# Altium PCB Biological Payload Data Consolidator.PcbDoc
Units mil, origin at the board's own origin, x right, y up, seen from the top; angles counter-clockwise.
Board outline 2500 x 2500 mil, 2 copper layers (Top Layer, Bottom Layer); 63 components, 50 nets, 249 pads, 126 vias.
Unrouted connection lines stored in the file: 2.
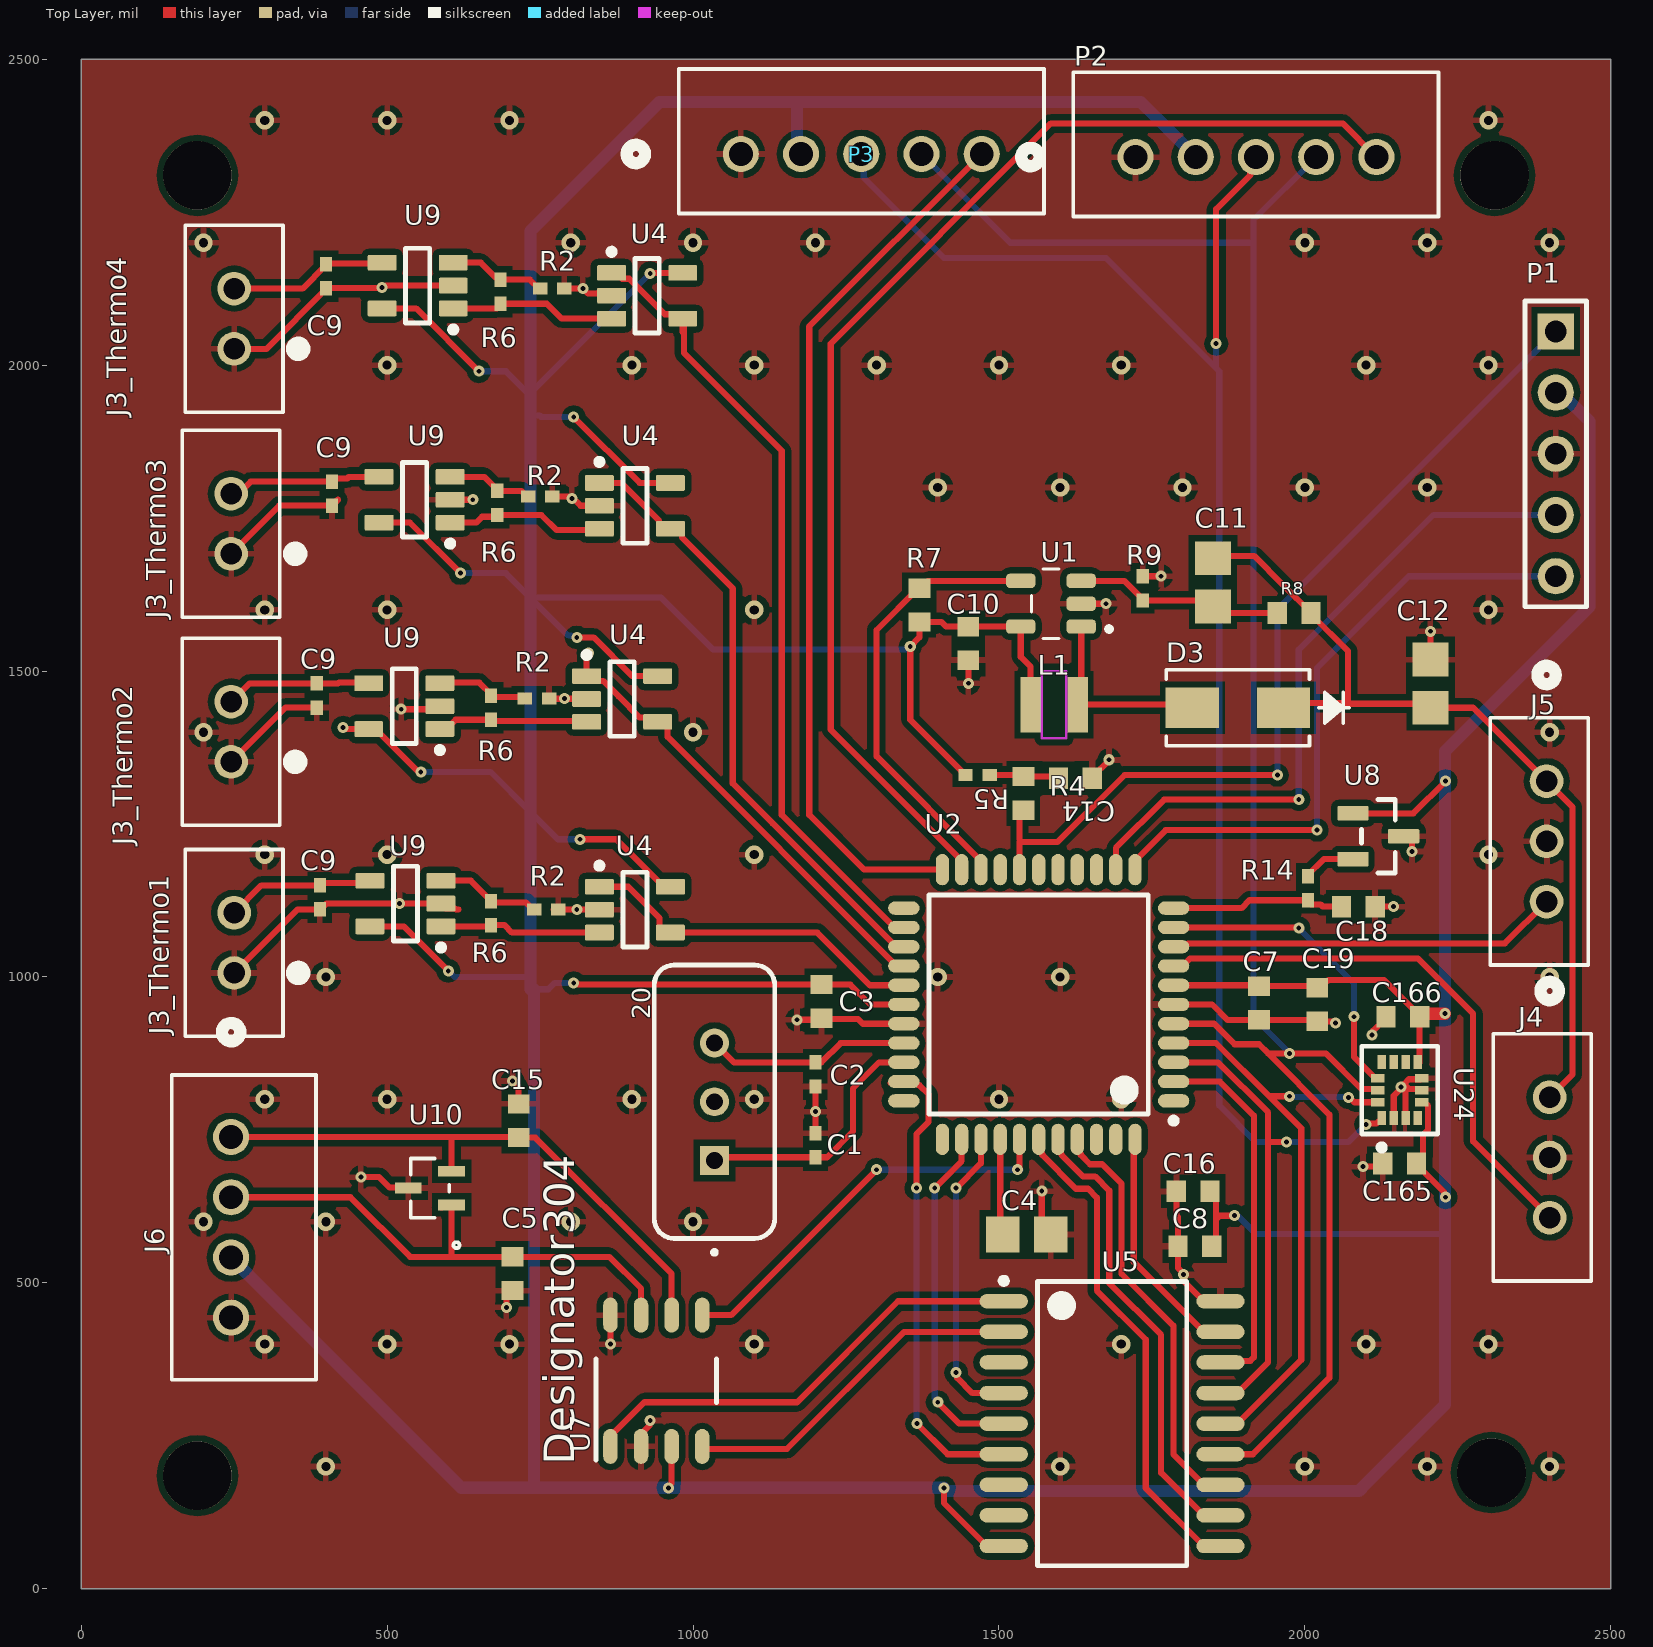
[diagram p0: Top Layer view]
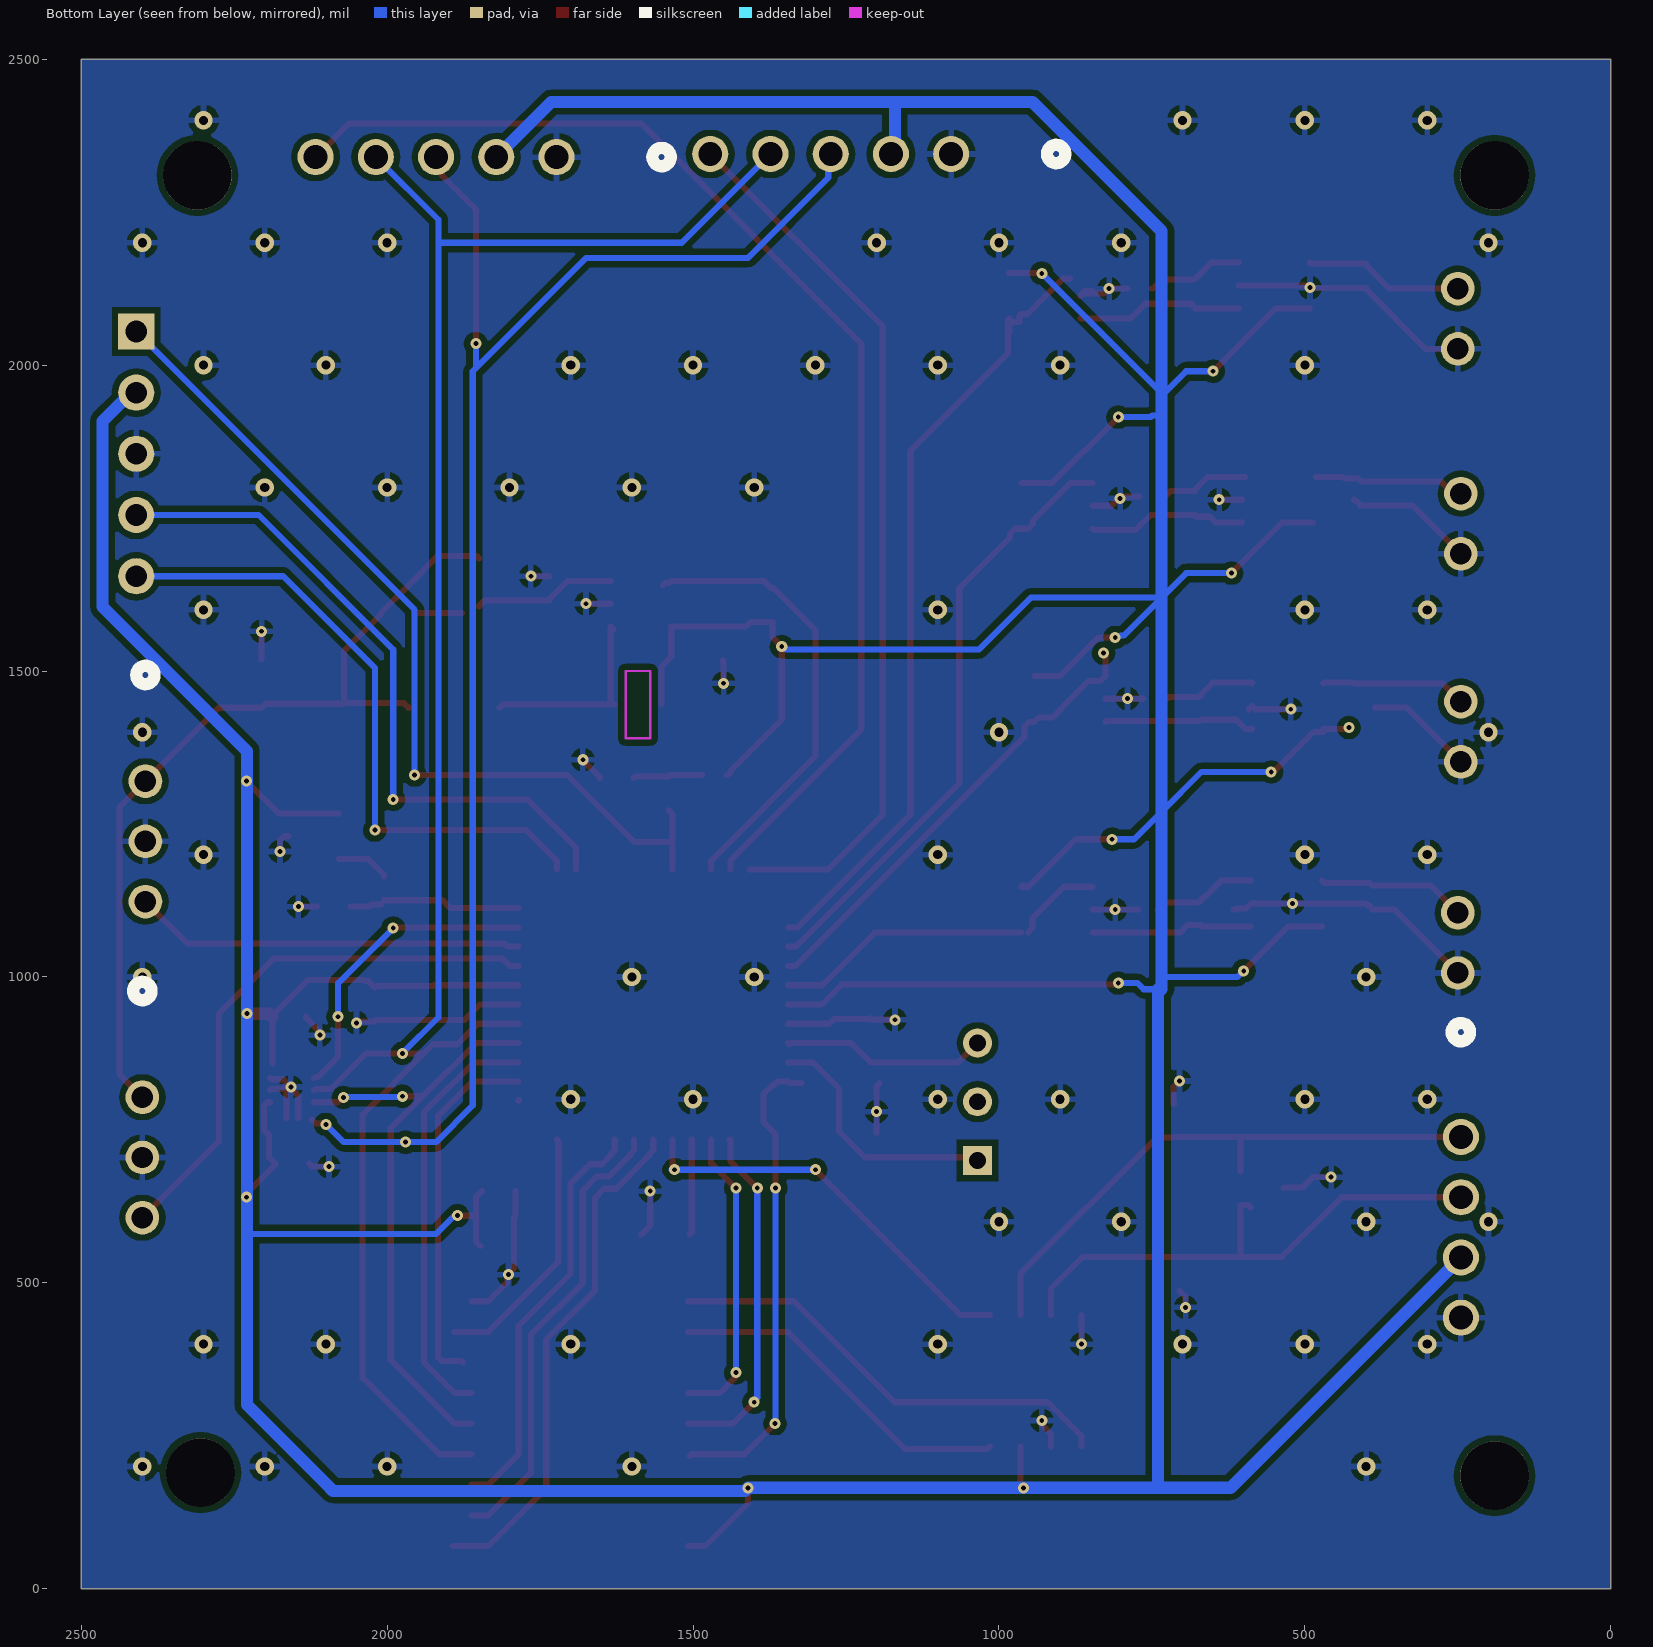
[diagram p1: Bottom Layer view, seen from below]

## Layer stack, top to bottom
Top Solder: solder mask 0.4, Solder Resist, Dk 3.5
Top Layer: signal copper 1.4
Dielectric 1: dielectric 12.6, FR-4, Dk 4.8
Bottom Layer: signal copper 1.4
Bottom Solder: solder mask 0.4, Solder Resist, Dk 3.5

## Board outline
0,0 2500,0 2500,2500 0,2500

## Design rules (kind name [scope] priority, off if disabled: settings)
Clearance [All] p1: gap=5 ignorepadtopadclearanceinfootprint=FALSE except(0: Arc-Text Arc-Hole Track-Text Track-Hole SMDPad-Hole THPad-Hole Via-Text Via-Hole Fill-Text Fill-Hole Poly-Text Poly-Hole Region-Text Region-Hole Text-Hole; 6: SMDPad-Text THPad-Text Text-Text; 10: Arc-Via Track-Via SMDPad-Via THPad-Via THPad-Fill THPad-Poly THPad-Region Via-Via Via-Fill Via-Poly Via-Region)
HoleSize [All] p1: absolutevalues=TRUE maxlimit=200 minlimit=1 maxpercent=80.000 minpercent=20.000
PolygonConnect [All] p1: connectstyle=Relief reliefconductorwidth=10 reliefentries=4 polygonreliefangle="90 Angle" airgapwidth=10
RoutingVias [All] p1: holewidth=28 width=50 viastyle="Through Hole" minholewidth=28 minwidth=50 maxholewidth=28 maxwidth=50
SolderMaskExpansion SolderMaskExpansion_1 [IsVia] p1: expansion=4 istentingtop=TRUE
SolderMaskExpansion [All] p2: expansion=2 istentingtop=FALSE
Width [All] p1: maxlimit=20 minlimit=5 preferedwidth=10 minimp=50.000000 maximp=50.000000 favimp=50.000000
29 further rules are at their usual default settings.

## Classes and differential pairs
component class Thermo4: C9 J3_Thermo4 J?_Thermo4 R2 R2_4 R6 U4 U9
component class Thermo3: C9 J3_Thermo3 J?_Thermo3 R2 R6 U4 U9
component class Thermo2: C9 J3_Thermo2 J?_Thermo2 R2 R6 U4 U9
component class Thermo1: C9 J3_Thermo1 J?_Thermo1 R2 R6 U4 U9
channel class Thermocouple: Thermocouple1 Thermocouple2 Thermocouple3 Thermocouple4
net class THERMO[1..4]: THERMO1 THERMO2
net class LED[1..2]: LED1 LED2
component class Designator: 20 C1 C2 C3 C4 C7 C14 P1 P2 P3 R4 R5 U2
component class Boost: C10 C11 C12 D3 L1 R7 R8 R9 U1 U?

## Components (designator, comment, footprint, x,y, rotation, side; value= is the part's Value field where it differs from the comment)
20 "ECS-200-20-4X" ECS-4X-3IL 1035,796.06 r90 top
C1 "Cap" 0402-A 1200,725 r90 top value=20pF
C2 "Cap" 0402-A 1199.84,840.63 r90 top value=20pF
C3 "Cap" 1608[0603] 1210,960 r90 top value=100nF
C4 "Cap" 6-0805_M 1545.37,579 r0 top value=10uF
C5 "Cap" 1608[0603] 705,515 r90 top value=100nF
C7 "Cap" 1608[0603] 1925,957.44 r90 top value=100nF
C8 "Cap" 1608[0603] 1820,560 r180 top value=100nF
C9 "Cap" 0402-A 400,2145.31 r90 top value=100pF
C9 "Cap" 0402-A 410,1790 r90 top value=100pF
C9 "Cap" 0402-A 385,1460 r90 top value=100pF
C9 "Cap" 0402-A 390,1130 r90 top value=100pF
C10 "Cap" 1608[0603] 1450,1545 r90 top value=2.2uF
C11 "Cap" 6-0805_M 1850,1645 r270 top value=510pF
C12 "Cap" 6-0805_M 2205,1479.37 r270 top value=4.7uF
C14 "Cap" 1608[0603] 1625,1325 r180 top value=100nF
C15 "Cap" 1608[0603] 715,765 r270 top value=100nF
C16 "Cap" 1608[0603] 1817.44,650 r0 top value=1nF
C18 "Cap" 1608[0603] 2087.44,1115 r180 top value=680pF
C19 "Cap" 1608[0603] 2020,955 r90 top value=100nF
C165 "Cap" 1608[0603] 2155,695 r0 top value=100nF
C166 "Cap" 1608[0603] 2160,935 r0 top value=100nF
D3 "CDBA5150-HF" CDBA5 1890.5,1440 r180 top
J3_Thermo1 "B2B-EH-A (LF)(SN)" "CONN_B2B-EH-A (LF)(SN)_JST" 250,1006.57 r90 top (schematic designator J3)
J3_Thermo2 "B2B-EH-A (LF)(SN)" "CONN_B2B-EH-A (LF)(SN)_JST" 245,1351.57 r90 top (schematic designator J3)
J3_Thermo3 "B2B-EH-A (LF)(SN)" "CONN_B2B-EH-A (LF)(SN)_JST" 245,1691.57 r90 top (schematic designator J3)
J3_Thermo4 "B2B-EH-A (LF)(SN)" "CONN_B2B-EH-A (LF)(SN)_JST" 250,2026.57 r90 top (schematic designator J3)
J4 "B3B-EH-A(LF)(SN)" CONN3_B3B-EH-A(LF)(SN)_JST 2400,803.43 r270 top
J5 "B3B-EH-A(LF)(SN)" CONN3_B3B-EH-A(LF)(SN)_JST 2395,1320 r270 top
J6 "B4B-XH-A (LF)(SN)" "CONN_B4B-XH-A (LF)(SN)_JST" 245,738.43 r270 top
L1 "74438323100" "SMD 2510" 1590,1445 r0 top
P1 "Header 5" HDR1X5 2410,2055 r270 top
P2 "Header 5" "CONN_B5B-XH-A (LF)(SN)_JST" 1723.14,2340 r0 top
P3 "Header 5" "CONN_B5B-XH-A (LF)(SN)_JST" 1078.14,2345 r0 top
R2 "Res1" 0402-A 770,2125 r0 top value=1k
R2 "Res1" 0402-A 750.31,1785 r0 top value=1k
R2 "Res1" 0402-A 745,1455 r0 top value=1k
R2 "Res1" 0402-A 760.32,1110 r0 top value=1k
R4 "Res1" 1608[0603] 1540,1300 r270 top value=330
R5 "Res1" 0402-A 1465,1330 r180 top value=10k
R6 "Res1" 0402-A 685,2120 r90 top value=1M
R6 "Res1" 0402-A 680,1774.68 r90 top value=1M
R6 "Res1" 0402-A 670,1440 r90 top value=1M
R6 "Res1" 0402-A 670,1104.33 r90 top value=1M
R7 "Res1" 1608[0603] 1370,1607.56 r90 top value=51k
R8 "Res1" 1608[0603] 1982.44,1595 r0 top value=51k
R9 "Res1" 0402-A 1735,1635 r90 top value=10k
R14 "Res1" 0402-A 2005,1145 r270 top value=0
U1 "LMR62014XMF/NOPD" SOT95P280X145-5N 1585,1610 r180 top
U2 "PIC18LF45K50-I/PT" MCHP-TQFP-PT44_L 1565,955 r180 top
U4 "OPA336NA/250" DBV0005A_M 884.14,1454.3 r0 top
U4 "OPA336NA/250" DBV0005A_M 925.04,2113.39 r0 top
U4 "OPA336NA/250" DBV0005A_M 905,1770 r0 top
U4 "OPA336NA/250" DBV0005A_M 905,1110 r0 top
U5 "MCP2515-I/SO" SOIC-SO18_L 1685,270 r0 top
U7 "TCAN334DR" D0008A_N 940,340 r90 top value=Value
U8 "TMP235AQDBZTQ1" FP-DBZ0003A-MFG 2120,1230 r0 top
U9 "OPA336NA/250" DBV0005A_M 550,2130 r180 top
U9 "OPA336NA/250" DBV0005A_M 545,1780 r180 top
U9 "OPA336NA/250" DBV0005A_M 528.07,1442.6 r180 top
U9 "OPA336NA/250" DBV0005A_M 530,1120 r180 top
U10 "D5V0L2B3W-7" SOT-323_DIO 570,655 r90 top
U24 "LSM6DSMTR" FP-LGA-14L-DM00249496-MFG 2155,815 r90 top

## Footprints (in the part's own frame and the unit in brackets; to place one, negate y for a bottom-side part, rotate by r counter-clockwise, add the part's x,y. Pads: shape width x height; smd on the part's side, far side on the other; paste and mask are expansions set on the pad)
6-0805_M [mm] "Chip Resistor, Body 2.0x1.2mm, IPC Low Density"
  rect 1.4x1.5 smd: 1(-1,0) 2(1,0)
  body extent -1.07,-0.7 1.07,0.7, height 0.7
0402-A [mm] "Chip Inductor, Body 1.0x0.5mm, IPC High Density"
  rect 0.6x0.5 smd: 1(-0.5,0) 2(0.5,0)
  body extent -0.55,-0.3 0.55,0.3, height 0.55
1608[0603] [mm] "Chip Capacitor, Body 1.6x0.8mm, IPC High Density"
  rect 0.8x0.9 smd: 1(-0.7,0) 2(0.7,0)
  body extent -0.87,-0.48 0.87,0.48, height 1.3
CDBA5 [mil]
  rect 87x67 smd paste+0 mask+0: 1(-74.5,0) 2(74.5,0)
  silkscreen extent -182,-62 117,62, body extent 0,0 10,10, height 10
CONN3_B3B-EH-A(LF)(SN)_JST [mil]
  round 55 hole 35 mask+0: 1(0,0) 2(98.43,0) 3(196.85,0)
  silkscreen extent -189,-92 300,68, body extent 0,0 10,10, height 10
"CONN_B2B-EH-A (LF)(SN)_JST" [mil]
  round 55 hole 35 mask+0: 1(0,0) 2(98.43,0)
  silkscreen extent -103,-115 202,80, body extent 0,0 10,10, height 10
"CONN_B4B-XH-A (LF)(SN)_JST" [mil]
  round 59 hole 39 mask+0: 1(0,0) 2(98.43,0) 3(196.86,0) 4(295.29,0)
  silkscreen extent -186,-97 397,139, body extent 0,0 10,10, height 10
"CONN_B5B-XH-A (LF)(SN)_JST" [mil]
  round 59 hole 39 mask+0: 1(0,0) 2(98.43,0) 3(196.86,0) 4(295.29,0) 5(393.72,0)
  silkscreen extent -187,-97 495,139, body extent 0,0 10,10, height 10
D0008A_N [mm]
  oval 1.45x0.6 smd paste+0 mask+0.051: 1(-2.725,1.905) 2(-2.725,0.635) 3(-2.725,-0.635) 4(-2.725,-1.905) 5(2.725,-1.905) 6(2.725,-0.635) 7(2.725,0.635) 8(2.725,1.905)
  silkscreen extent -3.3,-2.5 0.9,2.5, body extent 0,0 0.25,0.25, height 0.25
DBV0005A_M [mm] "SOT23, 5-Leads, Body 3.05x1.75mm, Pitch 0.95mm, IPC Low Density"
  rrect15% 1.2x0.65 smd: 1(-1.475,0.95) 2(-1.475,0) 3(-1.475,-0.95) 4(1.475,-0.95) 5(1.475,0.95)
  silkscreen extent -1.6,-1.55 0.5,1.95, body extent -1.42,-1.46 1.42,1.46, height 1.08
ECS-4X-3IL [mm]
  rect 1.2x1.2 hole 0.7: 1(-2.44,0)
  round 1.2 hole 0.7: 2(0,0) 3(2.44,0)
  silkscreen extent -6.34,-2.5 5.68,2.5, body extent -5.68,-2.5 5.68,2.5, height 3.5
FP-DBZ0003A-MFG [mm]
  rrect17% 1.3x0.6 smd paste+0 mask+0: 1(-1.05,0.95) 2(-1.05,-0.95) 3(1.05,0)
  silkscreen extent -0.7,-1.52 0.7,1.52, body extent -1.8,-1.62 1.8,1.62, height 0.25
FP-LGA-14L-DM00249496-MFG [mm]
  rect 0.575x0.35 smd paste+0 mask+0: 1(-1.162,0.75) 2(-1.162,0.25) 3(-1.162,-0.25) 4(-1.162,-0.75) 8(1.162,-0.75) 9(1.162,-0.25) 10(1.162,0.25) 11(1.162,0.75)
  rect 0.35x0.575 smd paste+0 mask+0: 5(-0.5,-0.913) 6(0,-0.913) 7(0.5,-0.913) 12(0.5,0.913) 13(0,0.913) 14(-0.5,0.913)
  silkscreen extent -2.5,-1.58 1.83,1.58, body extent -2.05,-1.8 2.05,1.8, height 0.25
HDR1X5 [mm] "Connector; Header; 5 Position"
  rect 1.5x1.5 hole 0.9: 1(0,0)
  round 1.5 hole 0.9: 2(2.54,0) 3(5.08,0) 4(7.62,0) 5(10.16,0)
  silkscreen extent -1.27,-1.27 11.43,1.27
MCHP-TQFP-PT44_L [mm] "QFN, 44-Leads, Body 10x10mm, Pitch 0.8mm, IPC High Density"
  oval 1.3x0.55 smd: 1(-5.6,4) 2(-5.6,3.2) 3(-5.6,2.4) 4(-5.6,1.6) 5(-5.6,0.8) 6(-5.6,0) 7(-5.6,-0.8) 8(-5.6,-1.6) 9(-5.6,-2.4) 10(-5.6,-3.2) 11(-5.6,-4) 23(5.6,-4) 24(5.6,-3.2) 25(5.6,-2.4) 26(5.6,-1.6) 27(5.6,-0.8) 28(5.6,0) 29(5.6,0.8) 30(5.6,1.6) 31(5.6,2.4) 32(5.6,3.2) 33(5.6,4)
  oval 0.55x1.3 smd: 12(-4,-5.6) 13(-3.2,-5.6) 14(-2.4,-5.6) 15(-1.6,-5.6) 16(-0.8,-5.6) 17(0,-5.6) 18(0.8,-5.6) 19(1.6,-5.6) 20(2.4,-5.6) 21(3.2,-5.6) 22(4,-5.6) 34(4,5.6) 35(3.2,5.6) 36(2.4,5.6) 37(1.6,5.6) 38(0.8,5.6) 39(0,5.6) 40(-0.8,5.6) 41(-1.6,5.6) 42(-2.4,5.6) 43(-3.2,5.6) 44(-4,5.6)
  silkscreen extent -5.72,-4.55 4.55,4.95, body extent -5,-5 5,5, height 1.2
"SMD 2510" [mm] "Chip Inductor, 2-Leads, Body 2.5x2.0mm, IPC Medium Density"
  rect 0.85x2.3 smd: 1(-0.975,0) 2(0.975,0)
  Keep-Out Layer lines w0.1: -0.508,-1.397 0.508,-1.397 0.508,1.397 -0.508,1.397 -0.508,-1.397
  body extent -1.25,-1 1.25,1, height 1
SOIC-SO18_L [mm] "SOIC, 18-Leads, Body 11.6x7.5mm, Pitch 1.27mm, IPC High Density"
  oval 2x0.6 smd: 1(-4.5,5.08) 2(-4.5,3.81) 3(-4.5,2.54) 4(-4.5,1.27) 5(-4.5,0) 6(-4.5,-1.27) 7(-4.5,-2.54) 8(-4.5,-3.81) 9(-4.5,-5.08) 10(4.5,-5.08) 11(4.5,-3.81) 12(4.5,-2.54) 13(4.5,-1.27) 14(4.5,0) 15(4.5,1.27) 16(4.5,2.54) 17(4.5,3.81) 18(4.5,5.08)
  silkscreen extent -4.62,-5.9 3.1,6.05, body extent -3.8,-5.87 3.8,5.87, height 2.65
SOT95P280X145-5N [mm]
  rrect50% 1.21x0.59 smd: 1(-1.255,0.95) 2(-1.255,0) 3(-1.255,-0.95) 4(1.255,-0.95) 5(1.255,0.95)
  silkscreen extent -2.51,-1.45 0.8,1.45
SOT-323_DIO [mm]
  rect 0.451x1.111 smd paste+0 mask+0: 1(-0.7,-0.9) 2(0.7,-0.9) 3(0,0.9)
  silkscreen extent -2.5,-1.23 1.23,0.8, body extent 0,0 0.25,0.25, height 0.25

## Part data
20: library part CMP-1669-00001-2, "CRYSTAL 20.000MHZ 20PF 49US", Manufacturer=ECS, ComponentLink1Description=Datasheet, ComponentLink1URL=http://www.ecsxtal.com/store/pdf/hc-49usx.pdf, PackageReference=4X-3IL, PartNumber=ECS-200-20-4X
C1 C2 C3 C4 C5 C7 C8 C9 C9 C9 C9 C10 C11 C12 C14 C15 C16 C18 C19 C165 C166: "Capacitor", LatestRevisionDate=17-Jul-2002, LatestRevisionNote="Re-released for DXP Platform.", PackageDescription="Radial Cap, Thru-Hole; 2 Leads; 0.3 in Pin Spacing", PackageReference=RAD-0.3, Published=8-Jun-2000, Publisher="Altium Limited"
D3 J3_Thermo1 J3_Thermo2 J3_Thermo3 J3_Thermo4 J4 J5 J6 U10: "No Description Available", Copyright="Copyright (C) 2018 Accelerated Designs. All rights reserved", RefDes=RefDes, Type=DEV
  D3: Built_By=EMA_UL_Team, Manufacturer_Part_Number=CDBA5150-HF, SourceLibrary=ComchipTechnology_2015-04-20, Vendor=Comchip
  J3_Thermo1 J3_Thermo2 J3_Thermo3 J3_Thermo4: Built_By=EMA_TJ, Manufacturer_Part_Number="B2B-EH-A (LF)(SN)", SourceLibrary=JST_2019-01-31, Vendor=JST
  J4 J5: Built_By=EMA_Kyle, Datasheet=http://www.jst-mfg.com/product/pdf/eng/eEH.pdf, Manufacturer_Part_Number=B3B-EH-A(LF)(SN), SourceLibrary=JST_2020-07-31, Vendor=JST
  J6: Built_By=EMA_Cory, Datasheet=http://www.jst-mfg.com/product/pdf/eng/eXH.pdf, Manufacturer_Part_Number="B4B-XH-A (LF)(SN)", SourceLibrary=JST_2020-02-03, Vendor=JST
  U10: Built_By=EMA_UL_Team, Manufacturer_Part_Number=D5V0L2B3W-7, SourceLibrary=DIODESINC_2_2015-08-18, Vendor="Diodes Inc"
L1: library part CMP-1411-00017-1, "Power Multilayer Inductor WE-MAPI, L=10.0µH", Inductance=10.0ÂµH, Manufacturer="Wuerth Elektronik", ComponentLink1Description="Manufacturer URL", ComponentLink1URL=http://www.we-online.com, ComponentLink2Description=Datasheet, ComponentLink2URL=http://katalog.we-online.de/kataloge/eisos/media/pdf/74438323100.pdf, PackageReference="SMD 2510", PartNumber=74438323100
P1 P2 P3: "Header, 5-Pin", LatestRevisionDate=17-Jul-2002, LatestRevisionNote="Re-released for DXP Platform.", Publisher="Altium Limited"
R2 R2 R2 R2 R4 R5 R6 R6 R6 R6 R7 R8 R9 R14: "Resistor", LatestRevisionDate=17-Jul-2002, LatestRevisionNote="Re-released for DXP Platform.", PackageDescription="Axial Device, Thru-Hole; 2 Leads; 0.3 in Pin Spacing", PackageReference=AXIAL-0.3, Published=8-Jun-2000, Publisher="Altium Limited"
U2: library part CMP-0116-01766-1, "Low-Power, High-Performance Microcontroller with XLP Technology, 48 MHz, 36 I/O, -40 to 85 degC, 44-pin TQFP (PT44), Tray", Manufacturer=Microchip, Operation Voltage Range="1.8V - 3.6V", # of A/D Channels=25, ComponentLink1Description=Datasheet, ComponentLink1URL=http://ww1.microchip.com/downloads/en/DeviceDoc/30684A.pdf, ComponentLink2Description="Package Specification", ComponentLink2URL=http://www.microchip.com/stellent/groups/techpub_sg/documents/packagingspec/en012702.pdf, ComponentLink3Description="URL Link1", ComponentLink3URL="Product URL:http://www.microchip.com/datasheet/PIC18F45K50", DatasheetVersion="Rev. A", Digital Communication="1 -A/E/USART, 1 -MSSP(SPI/I2C)", EEPROM Data Memory (bytes)=256, I/O Pins=36, Internal Oscillator="16 MHz, 31 kHz", Max. CPU Speed MHz=48, Memory Type=Flash, Mounting Technology="Surface Mount", PackageDescription="44-Lead Plastic Thin Quad Flatpack, 10 x 10 mm Body, 0.8 mm Pitch", PackageReference=TQFP-PT44, PackageVersion="C04-076B, 12/2012", Packing=TRAY, PartNumber=PIC18LF45K50-I/PT, Program Memory KBytes=32, Program Memory KWords=16, RAM=2048, Timers="2 - 8-bit, 2 - 16-bit, 0 - 32-bit"
U4 U4 U4 U4 U9 U9 U9 U9: library part CMP-0272-00910-3, "Single-Supply, MicroPower CMOS Operational Amplifier MicroAmplifier(TM) Series, 2.3 to 5.5 V, -55 to 125 degC, 5-pin SOT23 (DBV5), Green (RoHS & no Sb/Br)", Manufacturer="Texas Instruments", Total Supply Voltage(Max)(+5V is 5, +/-5V is 10)=5.5, Total Supply Voltage(Min)(+5V is 5, +/-5V is 10)=2.3, CMRR(Min)(dB)=76, Code_JEDEC=MO-178, ComponentLink1Description="Manufacturer URL", ComponentLink1URL=http://www.ti.com/, ComponentLink2Description=Datasheet, ComponentLink2URL=http://www.ti.com/general/docs/lit/getliterature.tsp?genericPartNumber=OPA336&fileType=pdf, ComponentLink3Description="Package Specification", ComponentLink3URL=http://www.ti.com/litv/pdf/mpds018i, DatasheetVersion=SBOS068C, Eco-Plan="Green (RoHS & no Sb/Br)", IIB(Max)(pA)=10, Iq per channel(Max)(mA)=0.032, Mounting Technology="Surface Mount", Number of Channels=1, Offset Drift(Typ)(uV/C)=1.5, PackageDescription="5-Pin Plastic Small Outline, Body 1.6 x 2.9 mm, Pitch 0.95 mm", PackageReference=DBV0005A, PackageVersion="4073253-4/K, 03/2006", PartNumber=OPA336NA/250, Slew Rate(Typ)(V/us)=0.03, Sub Family="Low Input Bias Current Amp (<=10pA), Low Offset Voltage Amplifier (<=500uV), Low Power Amp (<=500uA), Low Supply Voltage Amplifier (<=2.7V), Precision Amplifier", Vio (25C)(Max)(mV)=0.5, Vn at 1kHz(Typ)(nV/rtHz)=40
U5: library part CMP-0186-00133-2, "Stand-Alone CAN Controller With SPI Interface, 18-Pin SOIC, Industrial Temperature", Code_JEDEC=MS-013, ComponentLink1Description="Manufacturer URL", ComponentLink1URL=http://www.microchip.com/, ComponentLink2Description=Datasheet, ComponentLink2URL=http://ww1.microchip.com/downloads/en/DeviceDoc/21801f.pdf, ComponentLink3Description="Package Specification", ComponentLink3URL=http://www.microchip.com/stellent/groups/techpub_sg/documents/packagingspec/en012702.pdf, DatasheetVersion="revF, Oct-2010", PackageDescription="18-Lead Plastic Small Outline (SO) - Wide 7.50mm Body [SOIC]", PackageReference=SOIC-SO18, PackageVersion="revBB, Aug-2009", RevisionNote="URLs added. DatasheetVersion updated."
U7: "No Description Available", Manufacturer="Texas Instruments", Copyright="Copyright (C) 2018 Accelerated Designs. All rights reserved", PartNumber=TCAN334DR, RefDes=RefDes, Type=DEV
U8: library part CMP-04948-000003-1, "LOW-POWER HIGH-ACCURACY ANALOG O", Ambient Temperature Range High=+150°C, Ambient Temperature Range Low=-40°C, Manufacturer="Texas Instruments", Manufacturer Part Number=TMP235A2DBZR, Max Supply Voltage=5.5V, Min Supply Voltage=2.3V, Operating Supply Current=9uA, Output Current=500uA, Package=DBZ0003A, Temperature="-40°C to +150°C", Accuracy=0.5%, Automotive=No, Category=IC, ComponentLink2Description=Datasheet, ComponentLink2URL=http://www.ti.com/lit/ds/symlink/tmp235.pdf, Device Class L1=Sensors, Device Class L2="Temperature and Humidity Sensors", Device Class L3=unset, Digikey Description="LOW-POWER HIGH-ACCURACY ANALOG O", Height=1.12mm, Lead Free=Yes, Max Junction Temp=+150°C, Mouser Description="±2°C Analog output temperature sensor, with 10mV /°C gain 3-SOT-23 -40 to 150", Octopart=https://octopart.com/tmp235a2dbzr-texas+instruments-94966376, RoHS=TRUE, Sensor Output="Analog Voltage", Standoff Height=0.01mm, Temperature Range High=+150°C, Temperature Range Low=-40°C
U24: library part CMP-12177-000008-1, "IMU ACCEL/GYRO I2C/SPI 14LGA", Manufacturer=STMicroelectronics, Max Supply Voltage=3.6V, Min Supply Voltage=1.62V, Operating Supply Current=0.29-0.65mA, Package=LGA-14L-DM00249496, Temperature="-40°C to +85°C", Temperature Range High=+85°C, Temperature Range Low=-40°C, Accel Range=2/4/8/16g, Automotive=No, Category=IC, ComponentLink2Description=Datasheet, ComponentLink2URL=https://www.st.com/resource/en/datasheet/lsm6dsm.pdf, Device Class L1=Sensors, Device Class L2="Motion Sensors", Device Class L3="Inertial Measurement Units (IMUs)", Digikey Description="IMU ACCEL/GYRO I2C/SPI 14LGA", Footprint Url=https://www.st.com/content/ccc/resource/technical/document/technical_note/73/17/9c/16/dd/96/4a/01/CD00134799.pdf/files/CD00134799.pdf/jcr:content/translations/en.CD00134799.pdf, Gyro Range=125/250/500/1000/2000°/s, Height=0.86mm, Lead Free=Yes, Manufacturer Part Number=LSM6DSMTR, Mouser Description="LSM6DSM Series 3.6 V I2C/SPI 3D Accelerometer and 3D Gyroscope - LGA-14", Octopart=https://octopart.com/lsm6dsmtr-stmicroelectronics-66358194, Resolution=16bits, RoHS=TRUE, Sensor Output=I2C,SPI, Sensor Type=Temperature,Accelerometer,Gyroscope

## Free pads (board coordinates)
  round 112 hole 112 unplated: 6(190,185) 6(190,2310) 6(2305,190) 6(2310,2310)

## Via types
v1: diameter 18, hole 8, Top Layer to Bottom Layer, tented both sides, 65 vias
v2: diameter 30, hole 15, Top Layer to Bottom Layer, tented both sides, 61 vias

## Nets (pads, with @x,y where several pads share a name; then routed paths per layer and width w, separated by ;. In a path a pad name is that pad's centre, name@x,y a point inside that pad or via, vN(x,y) a via of type N, cw(c..) or ccw(c..) an arc to the next point about the centre after c; other vN are vias at no path point)
7V5: C11.1 C12.2 D3.1 J4.1 J5.1 R8.2 | length 1407
  Top Layer w10: C11.1 1853.77,1688.14 1916.86,1688.14 1965,1640 R8.2 ; D3.1 1972.5,1447.5 2070.63,1447.5 ; R8.2@2010,1593.03 2070.63,1532.4 2070.63,1446.52 2198.48,1446.52 C12.2 2275,1440 J5.1 2437.5,1277.5 2437.5,840.93 J4.1
CLK: P1.5 U2.12 | length 1050
  Top Layer w10: U2.12 1722.48,1190.24 1772.24,1240 v1(2020,1240)
  Bottom Layer w10: v1(2020,1240) 2020,1505 2170,1655 P1.5
DAT: P1.4 U2.13 | length 1123.4
  Top Layer w10: U2.13 1690.98,1210.98 1770,1290 v1(1990,1290)
  Bottom Layer w10: v1(1990,1290) 1990,1535 2210,1755 P1.4
GND: C1.2 C2.1 C3.1 C4.2 C5.1 C7.1 C8.2 C9.1 C10.1 C12.1 C14.1 C15.1 C16.1 C18.1 C19.1 C165.1 C166.1 J3_Thermo1.1 J3_Thermo2.1 J3_Thermo3.1 J3_Thermo4.1 J4.2 J5.2 J6.4 P1.3 P2.1 P3.1 R2.2 R9.2 U1.2 U2.6 U2.29 U4.2 U5.18 U7.2 U7.8 U8.3 U9.2 U10.3 U24.2 U24.3 U24.6 U24.7 | length 3300.8
  Top Layer w10: J3_Thermo2.1 333.74,1440.32 C9.1@385,1440.32 ; J3_Thermo3.1 323.74,1770.32 410,1770.32 410,1772.28 414.84,1777.13 416.81,1777.13 C9.1@419.68,1780 ; J3_Thermo1.1 353.74,1110.32 390,1110.32 390,1112.28 394.84,1117.13 397.83,1117.13 400.7,1120 v1(520.45,1120) 588.07,1120 595.87,1112.2 610.74,1112.2 612.55,1110.39 616.78,1110.39 616.86,1110.31 ; J3_Thermo4.1 302.91,2026.57 400,2123.66 400,2125.63 400.51,2126.14 491.14,2126.14 v1(491.64,2126.64) 493.81,2126.64 497.16,2130 U9.2@608.07,2130 ; v1(457.21,672.92) 487,672.92 503.76,656.16 533.41,656.16 U10.3 ; v1(523.07,1437.6) 581.14,1437.6 586.14,1442.6 U9.2@591.14,1437.6 ; U9.2@603.07,1780 v1(640,1780) ; v1(695,460) 695,477.44 C5.1 ; v1(705,830) 715,820 C15.1 C15.1@713.03,792.56 ; R2.2@764.69,1455 765.04,1454.65 825.72,1454.65 U4.2@826.07,1454.3 ; R2.2@770,1785 797.15,1785 799.87,1782.28 v1(802.03,1782.28) ; R2.2@772.14,1110 780,1110 U4.2@846.93,1110 ; R2.2@789.69,2125 820.17,2125 828.35,2116.81 863.55,2116.81 866.97,2113.39 859.18,2121.19 U4.2@847.14,2121.19 ; v1@804.75,1780.75 805.73,1780.75 816.38,1770.1 846.83,1770.1 U4.2@846.93,1770 ; v1(865,400) U7.8 ; U7.2 915,253.13 928.47,266.6 928.47,273.47 v1(930,275) ; v1(1170,930) 1207.56,930 C3.1 1210.93,931.51 1269.55,931.51 1277.55,923.5 U2.29 ; C2.1@1195,826.53 C2.1@1199.84,821.69 ; C2.1 1199.92,820.87 1199.92,780.08 v1(1200,780) C1.2 ; v1(1450,1480) C10.1 C10.1@1451.97,1517.44 ; v1(1570,650) 1570,593.74 C4.2 ; U1.2 v1(1675,1610) ; C14.1 1652.56,1326.97 1680,1354.41 v1(1680,1355) ; R9.2 1735.16,1654.84 1764.84,1654.84 v1(1765,1655) ; U2.6 1848.28,955 1873.4,929.88 C7.1 2017.56,929.88 C19.1 2047.56,927.44 v1(2050,925) ; C16.1 1789.88,610.12 1792.44,607.56 C8.2 1792.44,524.72 1801.53,515.63 v1(1801.53,513.47) 1803.06,511.94 1803.06,501.54 1834.61,470 U5.18 ; v1(2095,690) 2122.44,690 C165.1 ; v1(2110,905) 2111.53,906.53 2111.53,912.12 2132.44,933.03 C166.1 ; C18.1 v1(2145,1115) ; U24.2 2145.16,805.83 2157.37,818.04 v1(2157.37,820.21) v1@2162.16,825 ; U8.3 2168.19,1230 2175,1223.19 v1(2175,1205) ; v1@2164.61,818.23 2164.61,769.47 U24.3 ; U24.6 2189.04,816.89 2170.28,816.89 v1@2162.16,825 ; U24.7 2189.04,832.8 2169.96,832.8 v1@2162.16,825 ; C12.1 v1(2205,1565) ; J4.2 J4.2@2400,710
  Bottom Layer w10: P3.1 1078.14,2331.86 P3.1@1091.28,2331.86 ; P2.1@1723.14,2323.43 P2.1
  other v1: 810,1110 790,1455 820,2125
  other v2: 400,200 1600,200 2000,200 2200,200 2400,200 300,400 500,400 700,400 1100,400 1700,400 2100,400 2300,400 200,600 400,600 800,600 1000,600 300,800 500,800 900,800 1100,800 1500,800 1700,800 400,1000 1400,1000 1600,1000 2400,1000 300,1200 500,1200 1100,1200 2300,1200 200,1400 1000,1400 2400,1400 300,1600 500,1600 1100,1600 2300,1600 1400,1800 1600,1800 1800,1800 2000,1800 2200,1800 500,2000 900,2000 1100,2000 1300,2000 1500,2000 1700,2000 2100,2000 2300,2000 200,2200 800,2200 1000,2200 1200,2200 2000,2200 2200,2200 2400,2200 300,2400 500,2400 700,2400 2300,2400
INT: U2.41 U5.12 | length 689.3
  Top Layer w10: U2.41 1627.99,716.61 1633.66,710.94 1633.66,709.07 1648.79,693.94 1668.58,693.94 1700,662.52 1700,659.31 1700.25,659.06 1700.25,514.75 1785,430 1785,219.61 1834.61,170 U5.12
LED1: J4.3 U2.8 | length 918.3
  Top Layer w10: U2.8 1799.91,1017.99 1811.92,1030 2185,1030 2275,940 2275,731.57 J4.3
  Bottom Layer w10: J4.3@2399.07,607.5 J4.3
LED2: J5.3 U2.9 | length 640
  Top Layer w10: U2.9 1803.39,1049.49 1808.9,1055 2326.85,1055 J5.3
MCLR: P1.1 R4.2 U2.18 | length 1475.6
  Top Layer w10: U2.18 1533.5,1220.71 1595.87,1220.71 1705.17,1330 v1(1955,1330) ; 1533.5,1225 1533.5,1265.94 R4.2
  Bottom Layer w10: v1(1955,1330) 1955,1600 P1.1
MISO: P2.3 P3.3 U2.3 U5.15 U24.1 | length 3355
  Top Layer w10: U2.3 1857.92,860.51 1939.89,778.54 1939.89,370.17 1889.72,320 U5.15 ; v1(1855,2035) 1855,2255 1910.62,2310.62 1910.62,2330.62 P2.3 ; 1945,730 v1(1970,730) ; v1(2100.12,758.96) 2101.65,760.49 2116.73,760.49 U24.1@2123.27,767.03
  Bottom Layer w10: P3.3 1278.95,2341.05 1278.95,2306.36 1410.31,2175 1675,2175 1855,1995 ; v1(1855,2035) 1855,1995 ; P2.3@1903.99,2323.99 1907.58,2323.99 P2.3@1909.96,2321.61 ; v1(2100.12,758.96) 2071.16,730 v1(1970,730) 1920,730 1860,790 1860,1990 1855,1995
MOSI: U2.4 U5.14 U24.14 | length 1001.1
  Top Layer w10: U2.4 1854.71,892.01 1941.72,805 ; U5.14 1889.72,270 1994,374.28 1994,752.72 1941.72,805 ; v1(1975,805) 1941.72,805 ; v1(2071.28,802.92) 2073.45,802.92 2081.06,795.32 U24.14
  Bottom Layer w10: v1(1975,805) 1976.04,803.96 2070.25,803.96 v1(2071.28,802.92)
Net20_1: 20.1 C1.1 U2.31 | length 417
  Top Layer w10: 20.1 1040.32,705.32 C1.1 1218.98,705.32 1261.46,747.79 1261.46,817.78 1303.94,860.26 1344.27,860.26 U2.31
Net20_3: 20.3 C2.2 U2.30 | length 337.5
  Top Layer w10: 20.3 1066.81,860.31 C2.2 1209.69,860.31 1241.38,892.01 1340.51,892.01 1342.52,890 U2.30
NetC4_1: C4.1 U2.37 | length 157.2
  Top Layer w10: U2.37 1502.01,582.99 C4.1
NetC5_2: C5.2 J6.2 U7.7 U10.1 | length 884.2
  Top Layer w10: J6.2 440,640 537.44,542.56 605.43,542.56 ; U10.1@588.56,623.57 592.43,627.44 U10.1@593.56,627.44 ; U10.1@589.68,623.57 U10.1@593.56,627.44 ; U7.7 915,490.83 863.27,542.56 C5.2 605.43,542.56 ; U10.1@593.56,627.44 U10.1 605.43,542.56
NetC9_Thermo1_2: C9.2@390,1149.69 J3_Thermo1.2 U9.4@471.93,1157.4 | length 243.6
  Top Layer w10: J3_Thermo1.2 294.69,1149.69 390,1149.69 393.86,1153.54 468.07,1153.54 U9.4@471.93,1157.4
NetC9_Thermo2_2: C9.2@385,1479.69 J3_Thermo2.2 U9.4@470,1480 | length 238.6
  Top Layer w10: J3_Thermo2.2 245.42,1450 275.26,1479.84 384.84,1479.84 385,1479.69 419.85,1479.69 421.37,1481.2 468.8,1481.2 U9.4@470,1480
NetC9_Thermo3_2: C9.2@410,1809.69 J3_Thermo3.2 U9.4@486.93,1817.4 | length 248.3
  Top Layer w10: J3_Thermo3.2 257.18,1790 276.86,1809.69 408.03,1809.69 413.19,1814.84 434.84,1814.84 437.4,1817.4 U9.4@481.93,1817.4
NetC9_Thermo4_2: C9.2@400,2165 J3_Thermo4.2 U9.4@491.93,2167.4 | length 260.6
  Top Layer w10: J3_Thermo4.2 361.97,2125 400,2163.03 400,2165 401.2,2166.2 490.73,2166.2 U9.4@491.93,2167.4
NetC11_2: C11.2 R8.1 R9.1 U1.3 | length 311.5
  Top Layer w10: U1.3 1704.88,1647.4 1735,1617.28 R9.1 1840.31,1615.32 C11.2 ; C11.2@1877.46,1595 R8.1
NetC14_2: C14.2 R4.1 R5.1 | length 114.8
  Top Layer w10: R5.1 1537.56,1330 R4.1 1594.88,1327.56 C14.2
NetC15_2: C15.2 J6.1 U7.6 U10.2 | length 936.1
  Top Layer w10: J6.1 605.43,738.43 ; U10.2 605.43,738.43 ; U7.6 965,514.88 742.44,737.44 C15.2 714.01,738.43 605.43,738.43
NetD3_2: D3.2 L1.2 U1.1 | length 321.6
  Top Layer w10: U1.1@1630.12,1568.31 U1.1 ; U1.1@1634.41,1568.31 1634.41,1451.02 L1.2 1811,1445 D3.2
NetR2_Thermo1_1: R2.1@740.63,1110 R6.2@670,1124.02 U9.3@588.07,1157.4 | length 174.2
  Top Layer w10: U9.3@588.07,1157.4 636.61,1157.4 663.19,1130.83 665.16,1130.83 667.58,1128.41 R6.2@670,1125.98 ; R6.2@670,1124.02 R6.2@670,1125.98 ; R2.1@740.63,1110 738.66,1110 733.82,1114.84 727.08,1121.58 674.4,1121.58 R6.2@670,1125.98
NetR2_Thermo2_1: R2.1@725.32,1455 R6.2@670,1459.69 U9.3@586.14,1480 | length 151.5
  Top Layer w10: U9.3@586.14,1480 587.18,1481.04 650.61,1481.04 670,1461.65 670,1459.69 672.34,1457.34 722.97,1457.34 R2.1@725.32,1455
NetR2_Thermo3_1: R2.1@730.63,1785 R6.2@680,1794.37 U9.3@603.07,1817.4 | length 147.1
  Top Layer w10: U9.3@598.07,1817.4 658.94,1817.4 680,1796.34 680,1794.37 719.29,1794.37 728.66,1785 R2.1@730.63,1785
NetR2_Thermo4_1: R2.1@750.32,2125 R6.2@685,2139.69 U9.3@608.07,2167.4 | length 159.9
  Top Layer w10: U9.3@608.07,2167.4 653.17,2167.4 680.89,2139.69 685,2139.69 685.16,2139.84 733.5,2139.84 748.35,2125 R2.1@750.32,2125
NetR6_Thermo1_1: R6.1@670,1084.65 U4.3@846.93,1072.6 U9.1@588.07,1082.6 | length 264.7
  Top Layer w10: U9.1@588.07,1082.6 667.95,1082.6 670,1084.65 691.92,1084.65 703.97,1072.6 757.6,1072.6 U4.3@846.93,1072.6
NetR6_Thermo2_1: R6.1@670,1420.32 U4.3@826.07,1416.89 U9.1@586.14,1405.2 | length 247.6
  Top Layer w10: U9.1@586.14,1405.2 596.97,1405.2 612.09,1420.32 670,1420.32 671.71,1418.6 824.36,1418.6 U4.3@826.07,1416.89
NetR6_Thermo3_1: R6.1@680,1755 U4.3@846.93,1732.6 U9.1@603.07,1742.6 | length 260.3
  Top Layer w10: U9.1@603.07,1742.6 645.63,1742.6 655.16,1752.13 677.13,1752.13 680,1755 752.11,1755 776.91,1730.2 844.53,1730.2 U4.3@846.93,1732.6
NetR6_Thermo4_1: R6.1@685,2100.32 U4.3@866.97,2075.99 U9.1@608.07,2092.6 | length 273.3
  Top Layer w10: U9.1@608.07,2092.6 679.25,2092.6 685,2098.35 685,2100.32 760.83,2100.32 785.16,2075.99 U4.3@866.97,2075.99
NetR7_2: R7.2 U1.4 U2.20 | length 741.4
  Top Layer w10: U2.20 1470.51,1190.24 1300,1360.75 1300,1567.09 1368.03,1635.12 R7.2 1371.97,1635.12 1384.25,1647.4 U1.4 ; U1.4@1539.41,1643.58 1545.87,1643.58 U1.4@1548.6,1640.85
NetR14_1: R14.1 U8.2 | length 86.4
  Top Layer w10: R14.1 2005,1166.65 2030.94,1192.6 U8.2
NetU2_44: U2.44 U5.17 | length 417.9
  Top Layer w10: U2.44 1720.25,732.3 1720.25,534.36 1834.61,420 U5.17 U5.17@1889.72,420
NetU5_1: U5.1 U7.1 | length 750.9
  Top Layer w10: U7.1 865,249.45 920.55,305 1170,305 1335,470 U5.1
RX0BF: U2.39 U5.10 | length 846.5
  Top Layer w10: U2.39 1565,716.61 1570.67,710.94 1570.67,709.07 1625.8,653.94 1645.59,653.94 1660,639.53 1660,487.5 1740,407.5 1740,164.61 1834.61,70 U5.10 U5.10@1893.28,70
RX1BF: U2.40 U5.11 | length 752.3
  Top Layer w10: U2.40 1596.5,716.61 1602.17,710.94 1602.17,709.07 1637.29,673.94 1657.09,673.94 1680.25,650.77 1680.25,499.75 1765,415 1765,189.61 1834.61,120 U5.11
RXD: U5.2 U7.4 | length 573.8
  Top Layer w10: U7.4 1019.15,228.57 1153.57,228.57 1345,420 U5.2
SCK: P2.4 P3.4 U2.5 U5.13 U24.13 | length 3314.1
  Top Layer w10: U2.5 1851.5,923.5 1885,890 1925,890 1940,875 ; U5.13 1915,220 2040,345 2040,775 1940,875 ; U24.13 2117.18,816.89 2092.32,816.89 2034.21,875 v1(1975,875) 1940,875
  Bottom Layer w10: P3.4 1518.43,2200 1916,2200 ; v1(1975,875) 1916,934 1916,2200 ; P2.4 1916,2237.57 1916,2200
SHDN: U2.38 U7.5 | length 669.4
  Top Layer w10: U7.5 1062.28,447.28 v1(1300,685) ; v1(1530,685) 1530,687.16 1533.5,690.67 U2.38
  Bottom Layer w10: v1(1300,685) v1(1530,685) v1@1535,685
"SS 1": P2.5 U2.21 | length 2011.9
  Top Layer w10: U2.21 1439.02,1190.24 1225,1404.25 1225,2035 1585,2395 2061.86,2395 P2.5
"SS 2": P3.5 U2.22 | length 1451.4
  Top Layer w10: U2.22 1279.53,1175.47 1190,1265 1190,2063.14 P3.5
"SS ACC": U2.10 U24.12 | length 506.3
  Top Layer w10: U2.10 1989.02,1080.98 v1(1990,1080) ; v1(2080,935) 2080,869.33 2112.76,836.57 2117.18,836.57 U24.12
  Bottom Layer w10: v1(1990,1080) 2080,990 v1(2080,935)
"SS C": U2.2 U5.16 | length 593.2
  Top Layer w10: U2.2 1861.06,829.02 1916.54,773.54 1916.54,378.46 1910.68,372.61 1878.55,372.61 U5.16@1875.94,370
THERMO1: U2.24 U2.27 U4.1@846.93,1147.4 U4.1@866.97,2150.79 U4.4@963.07,1072.6 U4.4@983.12,2075.99 | length 1875.4
  Top Layer w10: U4.1@846.93,1147.4 894.16,1147.4 944.96,1096.61 944.96,1080.39 U4.4@952.75,1072.6 ; U4.1@884.32,2141.19 895.68,2141.19 920.09,2116.78 953.75,2083.13 964.49,2083.13 966.58,2081.03 966.58,2070.29 980.73,2070.29 982.82,2068.19 982.82,2054.05 985.04,2051.83 ; U4.4@963.07,1072.6 1203.07,1072.6 1289.17,986.5 U2.27 ; U4.4@983.12,2075.99 U4.4@985.04,2074.06 ; U4.4@985.04,2068.19 U4.4@985.04,2074.06 ; U2.24 1329.02,1080.98 1145,1265 1145,1860 985.04,2019.96 985.04,2051.83 ; 985.04,2051.83 985.04,2070.29 U4.4@985.04,2074.06
THERMO2: U2.25 U2.26 U4.1@826.07,1491.7 U4.1@846.93,1807.4 U4.4@942.21,1416.89 U4.4@963.07,1732.6 | length 1768.3
  Top Layer w10: v1(829.14,1529.3) 826.07,1526.23 826.07,1491.7 833.86,1483.9 852.97,1483.9 878.28,1458.59 912.84,1424.03 935.07,1424.03 942.21,1416.89 950.62,1416.89 958.41,1409.1 958.41,1392.5 1327.53,1023.38 1332.92,1017.99 U2.26 ; U4.1@846.93,1807.4 882.64,1807.4 944.45,1745.59 944.45,1740.39 952.24,1732.6 973.9,1732.6 981.69,1724.8 981.69,1718.31 1065,1635 1065,1316.29 1130,1251.29 1331.81,1049.49 U2.25
TMPOUT: C18.2 R14.2 U2.11 | length 285.2
  Top Layer w10: U2.11 1896.47,1112.48 1909.31,1125.31 R14.2 2005,1123.35 2009.84,1118.5 2025.63,1118.5 2029.13,1115 C18.2
TX0RTS: U2.36 U5.4 | length 493.6
  Top Layer w10: v1(1430,353.25) 1431.53,351.72 1431.53,344.97 1456.5,320 U5.4 ; v1(1430,655) 1470.51,695.51 U2.36
  Bottom Layer w10: v1(1430,353.25) v1(1430,655)
TX1RTS: U2.35 U5.5 | length 573.6
  Top Layer w10: v1(1395,655) 1439.02,699.02 U2.35 U2.35@1440,733.54 ; v1(1400,305) 1435,270 U5.5
  Bottom Layer w10: v1(1395,655) 1395,312.16 1400,307.16 v1(1400,305)
TX2RTS: U2.32 U5.6 | length 780.2
  Top Layer w10: U2.32@1322.51,826.79 1342.3,826.79 U2.32 1362.44,829.02 1368.11,823.35 1369.99,823.35 1385.12,808.22 1385.12,763.41 1365,743.3 v1(1365,655) ; v1(1366.06,270) 1416.06,220 1502.83,220 U5.6@1505.33,217.5
  Bottom Layer w10: v1(1365,655) 1365.53,654.47 1365.53,270.53 v1(1366.06,270)
VCC: C3.2 C7.2 C8.1 C10.2 C16.2 C19.2 C165.2 C166.2 J6.3 L1.1 P1.2 P2.2 P3.2 R5.2 R7.1 U1.5 U2.7 U2.28 U4.5 U5.9 U7.3 U8.1 U9.5 U24.5 U24.8 | length 13257.2
  Top Layer w10: J6.3@245,540 J6.3 ; v1(428.07,1407.6) 430.47,1405.2 470,1405.2 470,1400.67 485.35,1400.67 v1@553.43,1332.6 ; U9.5@471.93,1082.6 527.4,1082.6 v1(600,1010) ; U9.5@486.93,1742.6 537.4,1742.6 v1(620,1660) ; U9.5@491.93,2092.6 547.4,2092.6 v1(650,1990) ; v1(805,1915) 912.6,1807.4 U4.5@963.07,1807.4 ; v1@810,990 812.44,987.56 C3.2 1257.27,987.56 1289.83,955 U2.28 ; v1(810,1555) 837.38,1555 900.68,1491.7 U4.5@942.21,1491.7 ; v1@820,1225 874.65,1225 952.24,1147.4 963.07,1147.4 U4.5@959.96,1150.52 ; v1(930,2150) 930.4,2150.4 982.72,2150.4 U4.5@983.12,2150.79 ; v1(960,165) 960,167.16 965,172.16 U7.3 ; P3.2@1176.57,2340.07 P3.2 P3.2@1185.57,2354 ; v1(1410,165) 1410,140.28 1480.28,70 U5.9 ; R5.2 1443.35,1330 1438.5,1334.84 1438.5,1336.81 1355,1420.31 v1(1355,1540) 1370,1555 R7.1 1406.28,1580 1413.72,1572.56 C10.2 C10.2 U1.5 1535.59,1523.24 1551.61,1507.22 L1.1 ; U2.7 1923.5,986.5 C7.2 2017.56,985 C19.2 2030.75,993.31 2036.88,993.31 2038.57,995 2129.53,995 2187.56,936.97 C166.2 2187.56,859.39 U24.8@2186.73,858.56 ; C16.2 1855,640 1855,603.72 ; C8.1 1855,567.44 1855,603.72 ; v1(1885,610) 1884.72,609.72 1861,609.72 1855,603.72 ; U8.1 2177.4,1267.4 v1(2230,1320) ; U24.5 2195.35,795.32 2201.42,789.25 2201.42,750.26 2193.31,742.15 2193.31,705.75 C165.2 2182.56,693.03 v1@2228.47,647.12
  Top Layer w20: C166.2 2192.56,940 v1(2229,940)
  Bottom Layer w10: v1(428.07,1407.6) v1@430.24,1407.6 ; v1(555,1335) 669.22,1335 734.22,1270 779.22,1225 v1(815,1225) ; v1(600,1010) 610,1000 734.22,1000 ; v1(620,1660) 694.22,1660 734.22,1620 ; v1(650,1990) 694.22,1990 734.22,1950 ; 734.22,980 763.53,980 773.53,990 v1(805,990) ; 734.22,1925 741.54,1917.68 749.22,1917.68 751.89,1915 v1(805,1915) ; 734.22,1954.21 v1(930,2150) ; v1(810,1555) 808.47,1556.53 802.81,1556.53 801.42,1557.93 796.29,1557.93 734.22,1620 ; v1(1355,1540) 1354.37,1540 1352.84,1538.47 1351.3,1538.47 1347.84,1535 1032.89,1535 947.89,1620 734.22,1620 ; v1@1890,610 1920,580 2229,580
  Bottom Layer w20: J6.3 621.57,165 740,165 ; 734.22,980 734.22,1000 734.22,1270 734.22,1620 734.22,1915 734.22,1925 734.22,1950 734.22,1954.21 734.22,2219.22 945,2430 1170,2430 ; 740,980 740,165 ; P3.2 1170,2351.57 1170,2430 ; P2.2 1731.57,2430 1170,2430 ; P1.2 2418.28,1955 2465,1908.28 2465,1605 2229,1369 2229,1320 v1(2229,940) 2229,640 2229,580 2229,300.72 2100,171.72 2088.28,160 1415,160 v1(1410,165) v1(960,165) 740,165
  other v1: 2230,640
pads on no net: 20.2 U2.1 U2.14 U2.15 U2.16 U2.17 U2.19 U2.23 U2.33 U2.34 U2.42 U2.43 U5.3 U5.7 U5.8 U24.4 U24.9 U24.10 U24.11
copper on no net: | length 1.8
  Top Layer w10: 1784.23,798.76 1785.47,797.52

## Polygon pours and split planes (outlines as drawn)
GND on Bottom Layer "GND_L02_P000" (solid, pour order 0): 0,0 2500,0 2500,2500 0,2500
GND on Top Layer "GND_L01_P001" (solid, pour order 1): 0,2500 2500,2500 2500,0 0,0

## Text inside footprints (layer, text, board x,y; h text height)
J3_Thermo1: Mechanical 7 "9.842519E-02in/2.5mm (2 @ 9.842519E-02in/3mm)" at 399.8,774.54 h25 r90; Mechanical 7 "Alt 2 Padstyle: OX90Y60D30P" at 824.8,718.29 h50 r90; Mechanical 7 "Alt 1 Padstyle: OX60Y90D30P" at 724.8,718.29 h50 r90; Mechanical 7 "Default Padstyle: EX55Y55D35P" at 524.8,693.29 h50 r90
J3_Thermo2: Mechanical 7 "9.842519E-02in/2.5mm (2 @ 9.842519E-02in/3mm)" at 394.8,1119.54 h25 r90; Mechanical 7 "Alt 2 Padstyle: OX90Y60D30P" at 819.8,1063.29 h50 r90; Mechanical 7 "Alt 1 Padstyle: OX60Y90D30P" at 719.8,1063.29 h50 r90; Mechanical 7 "Default Padstyle: EX55Y55D35P" at 519.8,1038.29 h50 r90
J3_Thermo3: Mechanical 7 "9.842519E-02in/2.5mm (2 @ 9.842519E-02in/3mm)" at 394.8,1459.54 h25 r90; Mechanical 7 "Alt 2 Padstyle: OX90Y60D30P" at 819.8,1403.29 h50 r90; Mechanical 7 "Alt 1 Padstyle: OX60Y90D30P" at 719.8,1403.29 h50 r90; Mechanical 7 "Default Padstyle: EX55Y55D35P" at 519.8,1378.29 h50 r90
J3_Thermo4: Mechanical 7 "9.842519E-02in/2.5mm (2 @ 9.842519E-02in/3mm)" at 399.8,1794.54 h25 r90; Mechanical 7 "Alt 2 Padstyle: OX90Y60D30P" at 824.8,1738.29 h50 r90; Mechanical 7 "Alt 1 Padstyle: OX60Y90D30P" at 724.8,1738.29 h50 r90; Mechanical 7 "Default Padstyle: EX55Y55D35P" at 524.8,1713.29 h50 r90
J5: Mechanical 7 "0in/0mm" at 2382.5,904.57 h25 r270; Mechanical 7 "0.063in/1.6mm" at 2414,2011.07 h25 r270; Mechanical 7 "0.15in/3.81mm" at 2370.49,1961.07 h25 r270
J6: Mechanical 7 "0.226in/5.74mm" at 253.36,1389.79 h25 r270; Mechanical 7 "0.134in/3.4mm" at 299.43,1427.29 h25 r270; Mechanical 7 "0in/0mm" at 232.5,226.78 h25 r270; Mechanical 7 "0.488in/12.395mm" at 808.86,690.78 h25 r270; Mechanical 7 "0.098in/2.5mm" at 483.86,795.07 h25 r270; Mechanical 7 "Alt Padstyle 2: OX90Y60D30P" at -532.14,928.28 h50 r270; Mechanical 7 "Alt Padstyle 1: OX60Y90D30P" at -457.14,928.28 h50 r270; Mechanical 7 "Right Mtg Padstyle: EX60Y60D30P" at -382.14,978.28 h50 r270; Mechanical 7 "Left Mtg Padstyle: EX60Y60D30P" at -307.14,965.78 h50 r270; Mechanical 7 "3rd Mtg Padstyle: EX70Y70D70P" at -232.14,953.28 h50 r270; Mechanical 7 "2nd Mtg Padstyle: EX70Y70D70P" at -157.14,953.28 h50 r270; Mechanical 7 "1st Mtg Padstyle: EX91Y91D71P" at -82.14,953.28 h50 r270; Mechanical 7 "Default Padstyle: EX59Y59D39P" at -7.14,953.28 h50 r270
U7: Top Overlay "Designator304" at 806,203 h50 r90